# EAGLE board scrambler_v1_p1 (EAGLE 5.06)
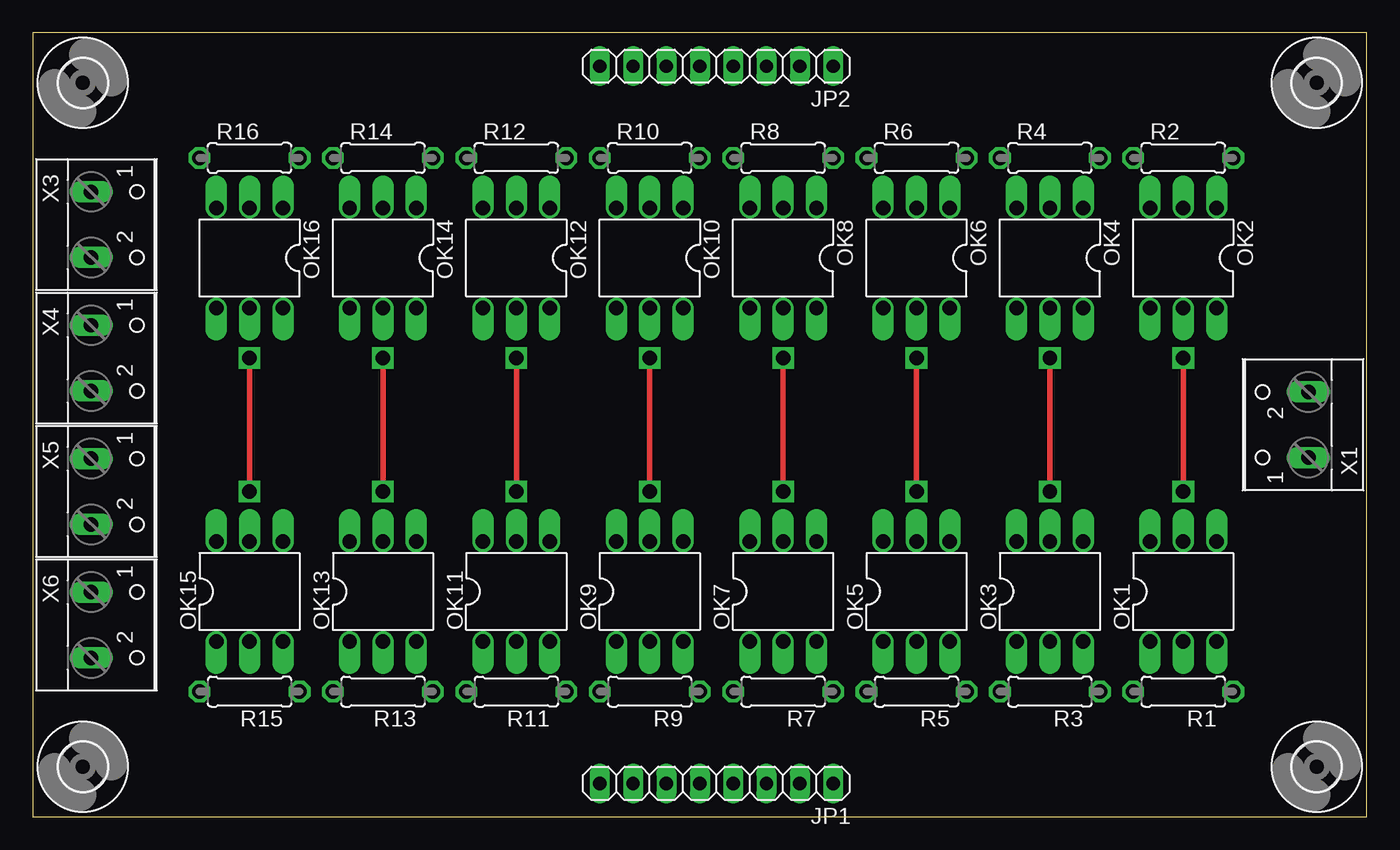
[diagram p0: board, top side]
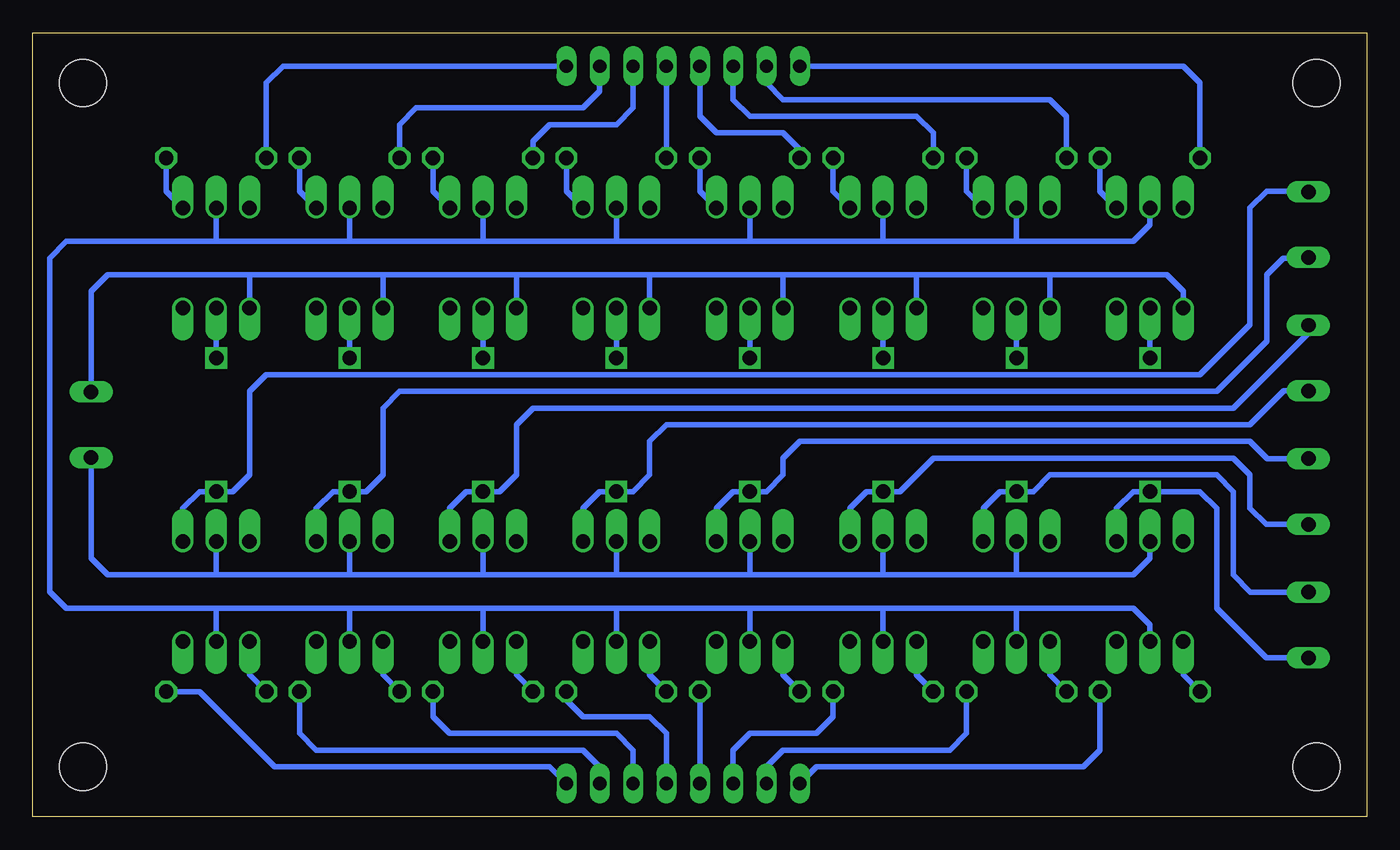
[diagram p1: board, bottom side, seen from below]

Size 101.6 x 59.69 mm. Coordinates in mm from the lower left corner, seen from the top.
Outline: 0,0 101.6,0 101.6,59.69 0,59.69 0,0
Copper layers (1*16): Top 0.035mm / dielectric 1.5mm / Bottom 0.035mm
Design rules "default": minimum track width 10mil, minimum drill 24mil, track to track 8mil, track to pad 8mil, pad to pad 8mil, via to via 8mil, smd to smd 8mil, copper to edge 40mil, drill to drill 8mil, minimum pad ring 10mil, minimum via ring 8mil, stop-mask expansion 4mil, vias tented up to drill 0mil, thermal gap 10mil

## Footprints (pad centres in the part's own frame; a part is rotated, then mirrored left to right if it is on the bottom)
1X08 = drill 1.016 long: 1 -8.89,0; 2 -6.35,0; 3 -3.81,0; 4 -1.27,0; 5 1.27,0; 6 3.81,0; 7 6.35,0; 8 8.89,0
DIL06 = drill 1.1 offset: 1 -2.54,-3.81; 2 0,-3.81; 3 2.54,-3.81; 4 2.54,3.81; 5 0,3.81; 6 -2.54,3.81
0207/7 = drill 1.1 octagon: 1 -3.81,0; 2 3.81,0
3,6 = hole 3.6: 0,0
W237-102 = drill 1.1 long: 1 -2.5,-1.27; 2 2.5,-1.27

## Placement (x,y rotation side)
JP1  [1X08]  52.07,2.54 180 top
JP2  [1X08]  52.07,57.15 180 top
OK1  H11D1  [DIL06]  87.63,17.14 0 top
OK2  H11D1  [DIL06]  87.63,42.55 180 top
OK3  H11D1  [DIL06]  77.47,17.14 0 top
OK4  H11D1  [DIL06]  77.47,42.55 180 top
OK5  H11D1  [DIL06]  67.31,17.14 0 top
OK6  H11D1  [DIL06]  67.31,42.55 180 top
OK7  H11D1  [DIL06]  57.15,17.14 0 top
OK8  H11D1  [DIL06]  57.15,42.55 180 top
OK9  H11D1  [DIL06]  46.99,17.14 0 top
OK10  H11D1  [DIL06]  46.99,42.55 180 top
OK11  H11D1  [DIL06]  36.83,17.14 0 top
OK12  H11D1  [DIL06]  36.83,42.55 180 top
OK13  H11D1  [DIL06]  26.67,17.14 0 top
OK14  H11D1  [DIL06]  26.67,42.55 180 top
OK15  H11D1  [DIL06]  16.51,17.14 0 top
OK16  H11D1  [DIL06]  16.51,42.55 180 top
R1  [0207/7]  87.63,9.53 180 top
R2  [0207/7]  87.63,50.16 0 top
R3  [0207/7]  77.47,9.53 180 top
R4  [0207/7]  77.47,50.16 0 top
R5  [0207/7]  67.31,9.53 180 top
R6  [0207/7]  67.31,50.16 0 top
R7  [0207/7]  57.15,9.53 180 top
R8  [0207/7]  57.15,50.16 0 top
R9  [0207/7]  46.99,9.53 180 top
R10  [0207/7]  46.99,50.16 0 top
R11  [0207/7]  36.83,9.53 180 top
R12  [0207/7]  36.83,50.16 0 top
R13  [0207/7]  26.67,9.53 180 top
R14  [0207/7]  26.67,50.16 0 top
R15  [0207/7]  16.51,9.53 180 top
R16  [0207/7]  16.51,50.16 0 top
U$1  [3,6]  3.81,55.88 180 top
U$2  [3,6]  3.81,3.81 180 top
U$3  [3,6]  97.79,3.81 180 top
U$4  [3,6]  97.79,55.88 180 top
X1  [W237-102]  95.89,29.84 90 top
X3  [W237-102]  5.71,45.09 270 top
X4  [W237-102]  5.71,34.92 270 top
X5  [W237-102]  5.71,24.77 270 top
X6  [W237-102]  5.71,14.61 270 top

## Library data of the parts
JP1 JP2 OK1-OK16 R1-R16 U$1-U$4 X1 X3-X6 = caixa

## Nets
/MIST1: JP1.1 R1.1
/MIST2: JP1.2 R3.1
/MIST3: JP1.3 R5.1
/MIST4: JP1.4 R7.1
/MIST5: JP1.5 R9.1
/MIST6: JP1.6 R11.1
/MIST7: JP1.7 R13.1
/MIST8: JP1.8 R15.1
BARRA1: OK1.4 OK2.5 X3.1
BARRA2: OK3.4 OK4.5 X3.2
BARRA3: OK5.4 OK6.5 X4.1
BARRA4: OK7.4 OK8.5 X4.2
BARRA5: OK9.4 OK10.5 X5.1
BARRA6: OK11.4 OK12.5 X5.2
BARRA7: OK13.4 OK14.5 X6.1
BARRA8: OK15.4 OK16.5 X6.2
GND: OK1.2 OK2.2 OK3.2 OK4.2 OK5.2 OK6.2 OK7.2 OK8.2 OK9.2 OK10.2 OK11.2 OK12.2 OK13.2 OK14.2 OK15.2 OK16.2
MIST1: JP2.1 R2.1
MIST2: JP2.2 R4.1
MIST3: JP2.3 R6.1
MIST4: JP2.4 R8.1
MIST5: JP2.5 R10.1
MIST6: JP2.6 R12.1
MIST7: JP2.7 R14.1
MIST8: JP2.8 R16.1
N$1: OK1.1 R1.2
N$2: OK2.1 R2.2
N$3: OK3.1 R3.2
N$4: OK4.1 R4.2
N$5: OK5.1 R5.2
N$6: OK6.1 R6.2
N$7: OK7.1 R7.2
N$8: OK8.1 R8.2
N$9: OK9.1 R9.2
N$10: OK10.1 R10.2
N$11: OK11.1 R11.2
N$12: OK12.1 R12.2
N$13: OK13.1 R13.2
N$14: OK14.1 R14.2
N$15: OK15.1 R15.2
N$16: OK16.1 R16.2
VCH+: OK1.5 OK3.5 OK5.5 OK7.5 OK9.5 OK11.5 OK13.5 OK15.5 X1.1
VCH-: OK2.4 OK4.4 OK6.4 OK8.4 OK10.4 OK12.4 OK14.4 OK16.4 X1.2

## Tracks (layer width: path | path; a pad name or v marks a point on that pad's centre or on a via)
/MIST1
  Bottom 0.406: R1.1 88.9,9.53 83.19,3.81 62.23,3.81 JP1.1
/MIST2
  Bottom 0.406: R3.1 81.28,6.35 80.01,5.08 59.69,5.08 58.42,3.81 JP1.2
/MIST3
  Bottom 0.406: R5.1 71.12,7.62 69.85,6.35 57.15,6.35 55.88,5.08 JP1.3
/MIST4
  Bottom 0.406: R7.1 60.96,8.89 59.69,7.62 54.61,7.62 53.34,6.35 JP1.4
/MIST5
  Bottom 0.406: JP1.5 R9.1
/MIST6
  Bottom 0.406: R11.1 40.64,7.62 41.91,6.35 46.99,6.35 48.26,5.08 JP1.6
/MIST7
  Bottom 0.406: R13.1 30.48,6.35 31.75,5.08 44.45,5.08 45.72,3.81 JP1.7
/MIST8
  Bottom 0.406: R15.1 20.32,5.08 21.59,3.81 41.91,3.81 JP1.8
BARRA1  (via drill 1.1)
  Top 0.406: v87.63,24.77 v87.63,34.92
  Bottom 0.406: X3.1 4.49,47.62 7.62,47.62 8.89,46.35 8.89,37.47 12.7,33.66 83.82,33.66 85.09,32.38 85.09,26.04 86.36,24.77 v87.63,24.77 88.9,24.77 90.17,23.5 OK1.4 | v87.63,34.92 OK2.5
BARRA2  (via drill 1.1)
  Top 0.406: v77.47,24.77 v77.47,34.92
  Bottom 0.406: X3.2 4.49,42.55 6.35,42.55 7.62,41.27 7.62,36.2 11.43,32.38 73.66,32.38 74.93,31.11 74.93,26.04 76.2,24.77 v77.47,24.77 78.74,24.77 80.01,23.5 OK3.4 | v77.47,34.92 OK4.5
BARRA3  (via drill 1.1)
  Top 0.406: v67.31,24.77 v67.31,34.92
  Bottom 0.406: X4.1 4.41,37.47 3.81,37.47 10.16,31.11 63.5,31.11 64.77,29.84 64.77,26.04 66.04,24.77 v67.31,24.77 68.58,24.77 69.85,23.5 OK5.4 | v67.31,34.92 OK6.5
BARRA4  (via drill 1.1)
  Top 0.406: v57.15,24.77 v57.15,34.92
  Bottom 0.406: X4.2 6.31,32.42 8.89,29.84 53.34,29.84 54.61,28.57 54.61,26.04 55.88,24.77 v57.15,24.77 58.42,24.77 59.69,23.5 OK7.4 | v57.15,34.92 OK8.5
BARRA5  (via drill 1.1)
  Top 0.406: v46.99,24.77 v46.99,34.92
  Bottom 0.406: X5.1 7.58,27.27 8.89,28.57 43.18,28.57 44.45,27.3 44.45,26.04 45.72,24.77 v46.99,24.77 48.26,24.77 49.53,23.5 OK9.4 | v46.99,34.92 OK10.5
BARRA6  (via drill 1.1)
  Top 0.406: v36.83,24.77 v36.83,34.92
  Bottom 0.406: X5.2 7.66,22.27 8.89,23.5 8.89,26.04 10.16,27.3 33.02,27.3 35.56,24.77 v36.83,24.77 38.1,24.77 39.37,23.5 OK11.4 | v36.83,34.92 OK12.5
BARRA7  (via drill 1.1)
  Top 0.406: v26.67,24.77 v26.67,34.92
  Bottom 0.406: X6.1 8.85,17.11 10.16,18.41 10.16,24.77 11.43,26.04 24.13,26.04 25.4,24.77 v26.67,24.77 27.94,24.77 29.21,23.5 OK13.4 | v26.67,34.92 OK14.5
BARRA8  (via drill 1.1)
  Top 0.406: v16.51,24.77 v16.51,34.92
  Bottom 0.406: X6.2 7.66,12.11 11.43,15.88 11.43,23.5 12.7,24.77 v16.51,24.77 17.78,24.77 19.05,23.5 OK15.4 | v16.51,34.92 OK16.5
GND
  Bottom 0.406: 46.99,43.81 OK10.2 | 46.99,43.81 36.83,43.81 | 36.83,43.81 OK12.2 | 57.15,43.81 46.99,43.81 | 57.15,43.81 OK8.2 | 67.31,43.81 57.15,43.81 | 67.31,43.81 OK6.2 | 77.47,43.81 67.31,43.81 | 77.47,43.81 OK4.2 | OK15.2 16.51,14.61 17.78,15.88 26.67,15.88 | 26.67,15.88 OK13.2 | 26.67,15.88 36.83,15.88 | 36.83,15.88 OK11.2 | 36.83,15.88 46.99,15.88 | 46.99,15.88 OK9.2 | 46.99,15.88 57.15,15.88 | 57.15,15.88 OK7.2 | 57.15,15.88 67.31,15.88 | 67.31,15.88 OK5.2 | 67.31,15.88 77.47,15.88 | 77.47,15.88 OK3.2 | 36.83,43.81 26.67,43.81 | 26.67,43.81 OK14.2 | 26.67,43.81 17.78,43.81 16.51,45.09 OK16.2 | 77.47,15.88 87.63,15.88 | 87.63,43.81 99.06,43.81 100.33,42.55 100.33,17.14 99.06,15.88 87.63,15.88 | 87.63,43.81 77.47,43.81 | 87.63,43.81 OK2.2 | 87.63,15.88 OK1.2
MIST1
  Bottom 0.406: R2.1 83.82,55.88 82.55,57.15 JP2.1
MIST2
  Bottom 0.406: R4.1 73.66,52.7 72.39,53.98 59.69,53.98 58.42,55.24 JP2.2
MIST3
  Bottom 0.406: JP2.3 55.88,53.98 57.15,52.7 62.23,52.7 63.5,51.44 R6.1
MIST4
  Bottom 0.406: R8.1 JP2.4
MIST5
  Bottom 0.406: JP2.5 50.8,53.34 49.53,52.07 44.45,52.07 43.18,50.8 R10.1
MIST6
  Bottom 0.406: JP2.6 48.26,54.61 46.99,53.34 34.29,53.34 33.02,52.07 R12.1
MIST7
  Bottom 0.406: R14.1 22.86,53.34 24.13,54.61 44.45,54.61 45.72,55.88 JP2.7
MIST8
  Bottom 0.406: JP2.8 13.97,57.15 12.7,55.88 R16.1
N$1
  Bottom 0.406: OK1.1 85.09,10.79 R1.2
N$2
  Bottom 0.406: R2.2 91.44,47.62 OK2.1
N$3
  Bottom 0.406: OK3.1 74.93,10.79 R3.2
N$4
  Bottom 0.406: R4.2 81.28,47.62 OK4.1
N$5
  Bottom 0.406: OK5.1 64.77,10.79 R5.2
N$6
  Bottom 0.406: R6.2 71.12,47.62 OK6.1
N$7
  Bottom 0.406: OK7.1 54.61,10.79 R7.2
N$8
  Bottom 0.406: R8.2 60.96,47.62 OK8.1
N$9
  Bottom 0.406: OK9.1 44.45,10.79 R9.2
N$10
  Bottom 0.406: R10.2 50.8,47.62 OK10.1
N$11
  Bottom 0.406: OK11.1 34.29,10.79 R11.2
N$12
  Bottom 0.406: R12.2 40.64,47.62 OK12.1
N$13
  Bottom 0.406: OK13.1 24.13,10.79 R13.2
N$14
  Bottom 0.406: R14.2 30.48,47.62 OK14.1
N$15
  Bottom 0.406: OK15.1 13.97,10.79 R15.2
N$16
  Bottom 0.406: R16.2 20.32,47.62 OK16.1
VCH+
  Bottom 0.406: 87.63,18.41 OK1.5 | 77.47,18.41 87.63,18.41 | 77.47,18.41 OK3.5 | 67.31,18.41 77.47,18.41 | 67.31,18.41 OK5.5 | 57.15,18.41 67.31,18.41 | 57.15,18.41 OK7.5 | 46.99,18.41 57.15,18.41 | 46.99,18.41 OK9.5 | 36.83,18.41 46.99,18.41 | 36.83,18.41 OK11.5 | 26.67,18.41 36.83,18.41 | 26.67,18.41 OK13.5 | OK15.5 16.51,19.68 17.78,18.41 26.67,18.41 | 87.63,18.41 95.89,18.41 97.16,19.68 X1.1
VCH-
  Bottom 0.406: 74.93,41.27 OK4.4 | 64.77,41.27 74.93,41.27 | 64.77,41.27 OK6.4 | 54.61,41.27 OK8.4 | 54.61,41.27 64.77,41.27 | 44.45,41.27 OK10.4 | 44.45,41.27 54.61,41.27 | 34.29,41.27 OK12.4 | 34.29,41.27 44.45,41.27 | 24.13,41.27 OK14.4 | 24.13,41.27 34.29,41.27 | 24.13,41.27 15.24,41.27 13.97,40.01 OK16.4 | X1.2 97.16,40.01 95.89,41.27 85.09,41.27 | 85.09,41.27 OK2.4 | 74.93,41.27 85.09,41.27